# Altium PCB Control_Supply_PCB.PcbDoc (part 2 of 3)
Units mm, origin at the board's own origin, x right, y up, seen from the top; angles counter-clockwise.
Board outline 82 x 102 mm, 2 copper layers (Top Layer, Bottom Layer); 204 components, 0 nets, 808 pads, 240 vias.
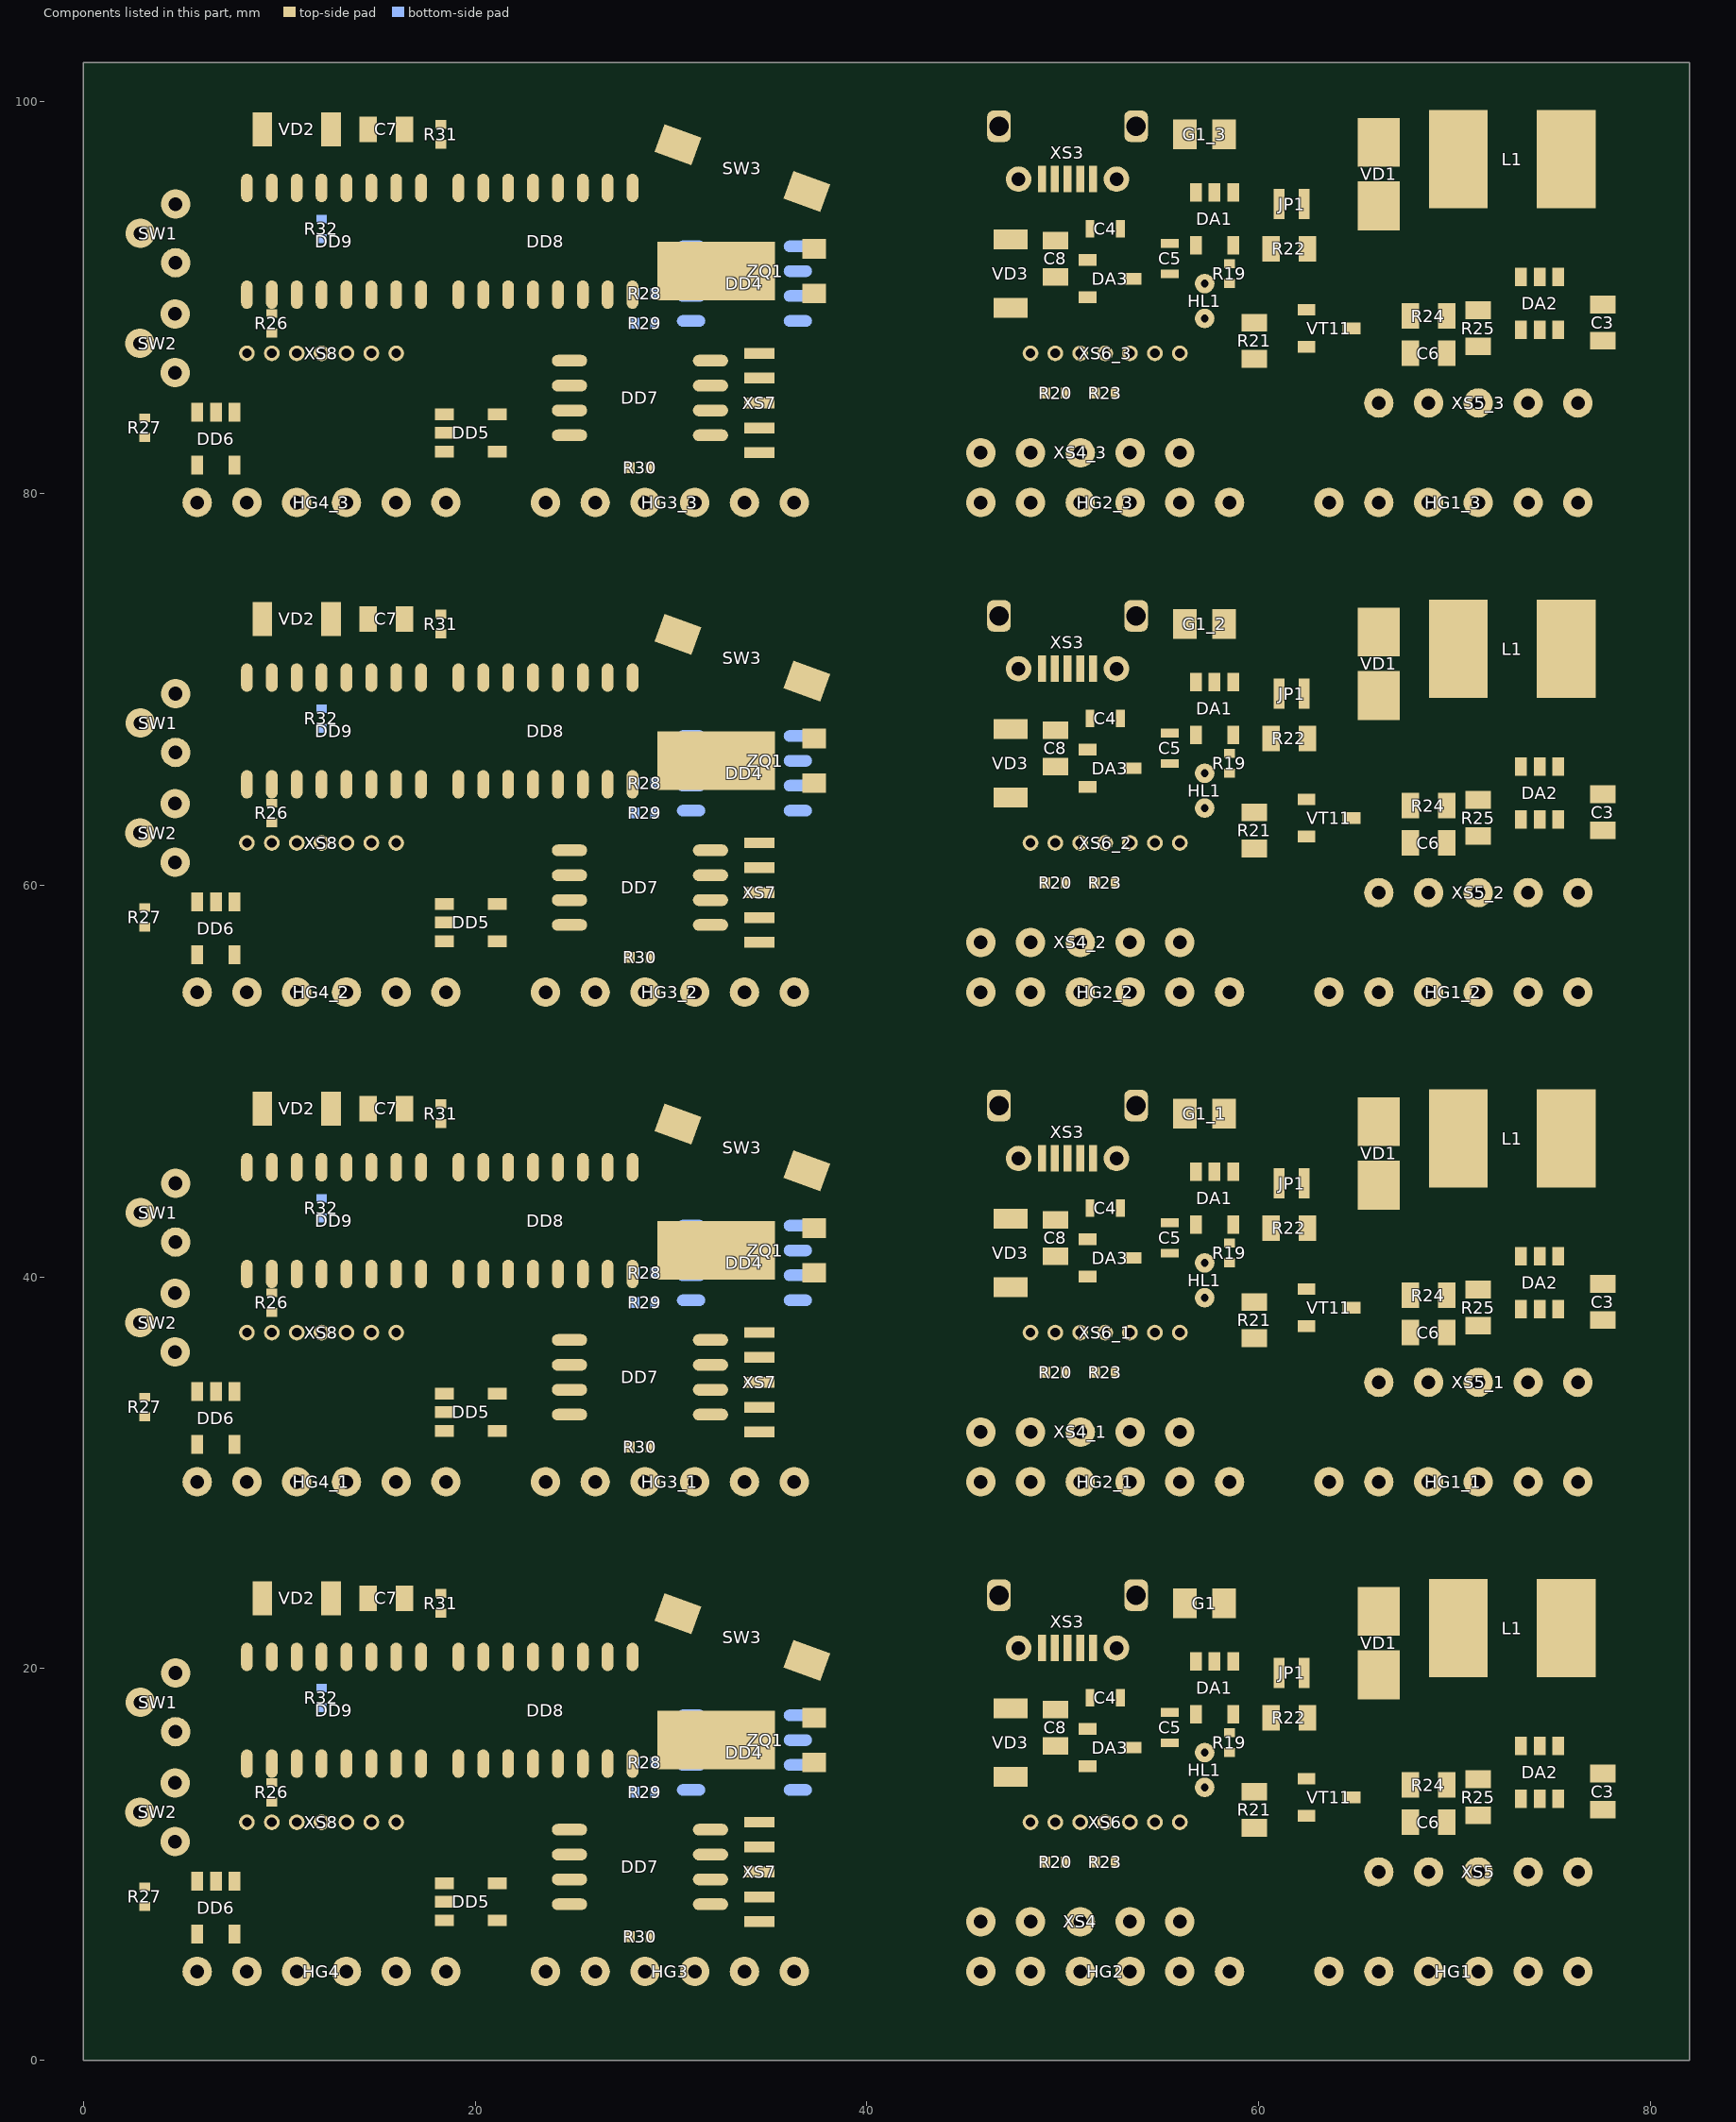
[diagram p2: the components of this part, seen from the top]

## Via types
v1: diameter 0.6, hole 0.3, Top Layer to Bottom Layer, 224 vias
v2: diameter 1.4, hole 1.3, Top Layer to Bottom Layer, 16 vias

## Nets (pads, with @x,y where several pads share a name; then routed paths per layer and width w, separated by ;. In a path a pad name is that pad's centre, name@x,y a point inside that pad or via, vN(x,y) a via of type N, cw(c..) or ccw(c..) an arc to the next point about the centre after c; other vN are vias at no path point) (continued)
copper on no net: | length 5010
  Top Layer w0.4: 3.068,7.833 3.093,7.858 3.143,7.858 3.193,7.858 3.905,7.146 3.905,7.06 ; 3.068,32.833 3.093,32.858 3.143,32.858 3.193,32.858 3.905,32.146 3.905,32.06 ; 3.068,57.833 3.093,57.858 3.143,57.858 3.193,57.858 3.905,57.146 3.905,57.06 ; 3.068,82.833 3.093,82.858 3.143,82.858 3.193,82.858 3.905,82.146 3.905,82.06 ; 3.215,8.883 3.19,8.858 3.143,8.858 3.143,9.747 4.564,11.168 4.685,11.168 ; 3.215,33.883 3.19,33.858 3.143,33.858 3.143,34.747 4.564,36.168 4.685,36.168 ; 3.215,58.883 3.19,58.858 3.143,58.858 3.143,59.747 4.564,61.168 4.685,61.168 ; 3.215,83.883 3.19,83.858 3.143,83.858 3.143,84.747 4.564,86.168 4.685,86.168 ; 4.685,14.168 4.794,14.277 4.794,16.693 4.707,16.78 5.675,17.748 8.604,17.748 9.62,16.732 9.62,15.15 9.62,14.184 ; 4.685,39.168 4.794,39.277 4.794,41.693 4.707,41.78 5.675,42.748 8.604,42.748 9.62,41.732 9.62,40.15 9.62,39.184 ; 4.685,64.168 4.794,64.277 4.794,66.693 4.707,66.78 5.675,67.748 8.604,67.748 9.62,66.732 9.62,65.15 9.62,64.184 ; 4.685,89.168 4.794,89.277 4.794,91.693 4.707,91.78 5.675,92.748 8.604,92.748 9.62,91.732 9.62,90.15 9.62,89.184 ; 4.707,19.78 6.993,22.066 11.711,22.066 12.092,21.685 v1(12.16,21.685) 12.16,20.6 ; 4.707,44.78 6.993,47.066 11.711,47.066 12.092,46.685 v1(12.16,46.685) 12.16,45.6 ; 4.707,69.78 6.993,72.066 11.711,72.066 12.092,71.685 v1(12.16,71.685) 12.16,70.6 ; 4.707,94.78 6.993,97.066 11.711,97.066 12.092,96.685 v1(12.16,96.685) 12.16,95.6 ; 5.81,4.54 5.813,4.543 5.813,6.443 5.815,6.445 ; 5.81,29.54 5.813,29.543 5.813,31.443 5.815,31.445 ; 5.81,54.54 5.813,54.543 5.813,56.443 5.815,56.445 ; 5.81,79.54 5.813,79.543 5.813,81.443 5.815,81.445 ; 5.915,9.245 5.815,9.145 5.815,8.97 3.905,7.06 ; 5.915,34.245 5.815,34.145 5.815,33.97 3.905,32.06 ; 5.915,59.245 5.815,59.145 5.815,58.97 3.905,57.06 ; 5.915,84.245 5.815,84.145 5.815,83.97 3.905,82.06 ; 6.765,9.145 6.826,9.206 v1(6.826,10.382) ; 6.765,34.145 6.826,34.206 v1(6.826,35.382) ; 6.765,59.145 6.826,59.206 v1(6.826,60.382) ; 6.765,84.145 6.826,84.206 v1(6.826,85.382) ; v1(7.588,23.59) 9.14,23.59 ; v1(7.588,48.59) 9.14,48.59 ; v1(7.588,73.59) 9.14,73.59 ; v1(7.588,98.59) 9.14,98.59 ; 7.715,6.445 7.715,6.62 8.985,7.89 ; 7.715,31.445 7.715,31.62 8.985,32.89 ; 7.715,56.445 7.715,56.62 8.985,57.89 ; 7.715,81.445 7.715,81.62 8.985,82.89 ; 8.35,4.54 6.445,2.635 5.175,2.635 3.905,3.905 3.905,7.06 ; 8.35,12.16 8.35,10.382 8.985,9.747 8.985,7.89 ; 8.35,15.15 v1(8.35,16.732) ; 8.35,20.6 8.35,19.34 9.561,18.129 13.049,18.129 v1(13.43,18.51) ; 8.35,29.54 6.445,27.635 5.175,27.635 3.905,28.905 3.905,32.06 ; 8.35,37.16 8.35,35.382 8.985,34.747 8.985,32.89 ; 8.35,40.15 v1(8.35,41.732) ; 8.35,45.6 8.35,44.34 9.561,43.129 13.049,43.129 v1(13.43,43.51) ; 8.35,54.54 6.445,52.635 5.175,52.635 3.905,53.905 3.905,57.06 ; 8.35,62.16 8.35,60.382 8.985,59.747 8.985,57.89 ; 8.35,65.15 v1(8.35,66.732) ; 8.35,70.6 8.35,69.34 9.561,68.129 13.049,68.129 v1(13.43,68.51) ; 8.35,79.54 6.445,77.635 5.175,77.635 3.905,78.905 3.905,82.06 ; 8.35,87.16 8.35,85.382 8.985,84.747 8.985,82.89 ; 8.35,90.15 v1(8.35,91.732) ; 8.35,95.6 8.35,94.34 9.561,93.129 13.049,93.129 v1(13.43,93.51) ; 9.62,12.16 9.62,13.184 ; 9.62,20.6 9.62,19.526 v1(10.255,18.891) ; 9.62,37.16 9.62,38.184 ; 9.62,45.6 9.62,44.526 v1(10.255,43.891) ; 9.62,62.16 9.62,63.184 ; 9.62,70.6 9.62,69.526 v1(10.255,68.891) ; 9.62,87.16 9.62,88.184 ; 9.62,95.6 9.62,94.526 v1(10.255,93.891) ; 10.89,15.15 10.89,13.684 11.398,13.176 14.319,13.176 14.7,12.795 14.7,12.16 14.7,10.255 16.859,8.096 18.43,8.096 ; 10.89,20.6 10.89,20.229 11.72,19.399 17.367,19.399 18.138,18.628 18.138,13.82 16.518,12.2 16.01,12.2 15.97,12.16 ; 10.89,40.15 10.89,38.684 11.398,38.176 14.319,38.176 14.7,37.795 14.7,37.16 14.7,35.255 16.859,33.096 18.43,33.096 ; 10.89,45.6 10.89,45.229 11.72,44.399 17.367,44.399 18.138,43.628 18.138,38.82 16.518,37.2 16.01,37.2 15.97,37.16 ; 10.89,65.15 10.89,63.684 11.398,63.176 14.319,63.176 14.7,62.795 14.7,62.16 14.7,60.255 16.859,58.096 18.43,58.096 ; 10.89,70.6 10.89,70.229 11.72,69.399 17.367,69.399 18.138,68.628 18.138,63.82 16.518,62.2 16.01,62.2 15.97,62.16 ; 10.89,90.15 10.89,88.684 11.398,88.176 14.319,88.176 14.7,87.795 14.7,87.16 14.7,85.255 16.859,83.096 18.43,83.096 ; 10.89,95.6 10.89,95.229 11.72,94.399 17.367,94.399 18.138,93.628 18.138,88.82 16.518,87.2 16.01,87.2 15.97,87.16 ; 12.16,12.16 12.16,9.62 15.97,5.81 15.97,4.54 17.24,3.27 32.48,3.27 33.75,4.54 ; 12.16,15.15 v1(12.16,16.732) ; 12.16,37.16 12.16,34.62 15.97,30.81 15.97,29.54 17.24,28.27 32.48,28.27 33.75,29.54 ; 12.16,40.15 v1(12.16,41.732) ; 12.16,62.16 12.16,59.62 15.97,55.81 15.97,54.54 17.24,53.27 32.48,53.27 33.75,54.54 ; 12.16,65.15 v1(12.16,66.732) ; 12.16,87.16 12.16,84.62 15.97,80.81 15.97,79.54 17.24,78.27 32.48,78.27 33.75,79.54 ; 12.16,90.15 v1(12.16,91.732) ; 12.64,23.59 14.537,23.59 14.7,23.427 v1(14.7,21.812) 14.662,21.774 14.662,21.117 14.7,21.079 ; 12.64,48.59 14.537,48.59 14.7,48.427 v1(14.7,46.812) 14.662,46.774 14.662,46.117 14.7,46.079 ; 12.64,73.59 14.537,73.59 14.7,73.427 v1(14.7,71.812) 14.662,71.774 14.662,71.117 14.7,71.079 ; 12.64,98.59 14.537,98.59 14.7,98.427 v1(14.7,96.812) 14.662,96.774 14.662,96.117 14.7,96.079 ; 13.43,4.54 13.43,6.445 11.985,7.89 8.985,7.89 ; 13.43,12.16 13.43,9.62 15.97,7.08 v1(17.24,7.08) 17.273,7.113 18.397,7.113 18.43,7.146 19.46,7.146 20.813,5.793 24.877,5.793 26.13,4.54 ; 13.43,15.15 13.43,15.629 13.53,15.729 13.53,15.816 16.224,18.51 16.969,18.51 v1(16.986,18.527) ; 13.43,20.6 v1(13.43,21.812) ; 13.43,29.54 13.43,31.445 11.985,32.89 8.985,32.89 ; 13.43,37.16 13.43,34.62 15.97,32.08 v1(17.24,32.08) 17.273,32.113 18.397,32.113 18.43,32.146 19.46,32.146 20.813,30.793 24.877,30.793 26.13,29.54 ; 13.43,40.15 13.43,40.629 13.53,40.729 13.53,40.816 16.224,43.51 16.969,43.51 v1(16.986,43.527) ; 13.43,45.6 v1(13.43,46.812) ; 13.43,54.54 13.43,56.445 11.985,57.89 8.985,57.89 ; 13.43,62.16 13.43,59.62 15.97,57.08 v1(17.24,57.08) 17.273,57.113 18.397,57.113 18.43,57.146 19.46,57.146 20.813,55.793 24.877,55.793 26.13,54.54 ; 13.43,65.15 13.43,65.629 13.53,65.729 13.53,65.816 16.224,68.51 16.969,68.51 v1(16.986,68.527) ; 13.43,70.6 v1(13.43,71.812) ; 13.43,79.54 13.43,81.445 11.985,82.89 8.985,82.89 ; 13.43,87.16 13.43,84.62 15.97,82.08 v1(17.24,82.08) 17.273,82.113 18.397,82.113 18.43,82.146 19.46,82.146 20.813,80.793 24.877,80.793 26.13,79.54 ; 13.43,90.15 13.43,90.629 13.53,90.729 13.53,90.816 16.224,93.51 16.969,93.51 v1(16.986,93.527) ; 13.43,95.6 v1(13.43,96.812) ; v1(15.97,14.065) 15.97,15.15 ; v1(15.97,39.065) 15.97,40.15 ; v1(15.97,64.065) 15.97,65.15 ; v1(15.97,89.065) 15.97,90.15 ; 16.387,23.59 16.633,23.836 18.256,23.836 ; 16.387,48.59 16.633,48.836 18.256,48.836 ; 16.387,73.59 16.633,73.836 18.256,73.836 ; 16.387,98.59 16.633,98.836 18.256,98.836 ; v1(16.986,9.112) 16.986,11.652 18.002,12.668 19.399,12.668 20.377,13.646 20.377,15.112 20.415,15.15 ; v1(16.986,34.112) 16.986,36.652 18.002,37.668 19.399,37.668 20.377,38.646 20.377,40.112 20.415,40.15 ; v1(16.986,59.112) 16.986,61.652 18.002,62.668 19.399,62.668 20.377,63.646 20.377,65.112 20.415,65.15 ; v1(16.986,84.112) 16.986,86.652 18.002,87.668 19.399,87.668 20.377,88.646 20.377,90.112 20.415,90.15 ; 17.24,20.6 v1(17.24,21.812) ; 17.24,45.6 v1(17.24,46.812) ; 17.24,70.6 v1(17.24,71.812) ; 17.24,95.6 v1(17.24,96.812) ; 18.256,22.836 18.256,19.73 20.255,17.731 25.605,17.731 26.765,18.891 ; 18.256,47.836 18.256,44.73 20.255,42.731 25.605,42.731 26.765,43.891 ; 18.256,72.836 18.256,69.73 20.255,67.731 25.605,67.731 26.765,68.891 ; 18.256,97.836 18.256,94.73 20.255,92.731 25.605,92.731 26.765,93.891 ; 18.51,4.54 23.59,4.54 ; 18.51,29.54 23.59,29.54 ; 18.51,54.54 23.59,54.54 ; 18.51,79.54 23.59,79.54 ; v1(18.764,10.636) 20.288,10.636 22.955,13.303 27.781,13.303 30.575,10.509 32.016,10.509 ; v1(18.764,35.636) 20.288,35.636 22.955,38.303 27.781,38.303 30.575,35.509 32.016,35.509 ; v1(18.764,60.636) 20.288,60.636 22.955,63.303 27.781,63.303 30.575,60.509 32.016,60.509 ; v1(18.764,85.636) 20.288,85.636 22.955,88.303 27.781,88.303 30.575,85.509 32.016,85.509 ; 19.145,15.15 19.145,14.671 19.478,14.338 19.478,14.271 v1(19.399,14.192) ; 19.145,20.6 v1(19.145,21.832) 19.193,21.88 19.193,22.225 20.304,23.336 29.274,23.336 30.315,22.295 ; 19.145,40.15 19.145,39.671 19.478,39.338 19.478,39.271 v1(19.399,39.192) ; 19.145,45.6 v1(19.145,46.832) 19.193,46.88 19.193,47.225 20.304,48.336 29.274,48.336 30.315,47.295 ; 19.145,65.15 19.145,64.671 19.478,64.338 19.478,64.271 v1(19.399,64.192) ; 19.145,70.6 v1(19.145,71.832) 19.193,71.88 19.193,72.225 20.304,73.336 29.274,73.336 30.315,72.295 ; 19.145,90.15 19.145,89.671 19.478,89.338 19.478,89.271 v1(19.399,89.192) ; 19.145,95.6 v1(19.145,96.832) 19.193,96.88 19.193,97.225 20.304,98.336 29.274,98.336 30.315,97.295 ; v1(20.034,19.018) 20.415,19.399 20.415,20.6 ; v1(20.034,44.018) 20.415,44.399 20.415,45.6 ; v1(20.034,69.018) 20.415,69.399 20.415,70.6 ; v1(20.034,94.018) 20.415,94.399 20.415,95.6 ; 21.13,7.146 21.163,7.113 21.977,7.113 22.066,7.024 v1(22.066,7.08) ; 21.13,9.046 21.196,9.112 21.958,8.35 v1(22.066,8.35) ; 21.13,32.146 21.163,32.113 21.977,32.113 22.066,32.024 v1(22.066,32.08) ; 21.13,34.046 21.196,34.112 21.958,33.35 v1(22.066,33.35) ; 21.13,57.146 21.163,57.113 21.977,57.113 22.066,57.024 v1(22.066,57.08) ; 21.13,59.046 21.196,59.112 21.958,58.35 v1(22.066,58.35) ; 21.13,82.146 21.163,82.113 21.977,82.113 22.066,82.024 v1(22.066,82.08) ; 21.13,84.046 21.196,84.112 21.958,83.35 v1(22.066,83.35) ; v1(21.661,14.175) 21.673,14.187 21.673,15.138 21.685,15.15 ; v1(21.661,39.175) 21.673,39.187 21.673,40.138 21.685,40.15 ; v1(21.661,64.175) 21.673,64.187 21.673,65.138 21.685,65.15 ; v1(21.661,89.175) 21.673,89.187 21.673,90.138 21.685,90.15 ; 21.685,20.6 21.685,21.079 21.891,21.285 21.891,21.51 v1(21.939,21.558) ; 21.685,45.6 21.685,46.079 21.891,46.285 21.891,46.51 v1(21.939,46.558) ; 21.685,70.6 21.685,71.079 21.891,71.285 21.891,71.51 v1(21.939,71.558) ; 21.685,95.6 21.685,96.079 21.891,96.285 21.891,96.51 v1(21.939,96.558) ; v1(21.812,10.636) 21.812,10.799 23.662,12.649 27.419,12.649 30.829,9.239 32.016,9.239 ; v1(21.812,35.636) 21.812,35.799 23.662,37.649 27.419,37.649 30.829,34.239 32.016,34.239 ; v1(21.812,60.636) 21.812,60.799 23.662,62.649 27.419,62.649 30.829,59.239 32.016,59.239 ; v1(21.812,85.636) 21.812,85.799 23.662,87.649 27.419,87.649 30.829,84.239 32.016,84.239 ; v1(22.447,18.51) 23.267,18.51 24.225,19.468 24.225,20.6 ; v1(22.447,43.51) 23.267,43.51 24.225,44.468 24.225,45.6 ; v1(22.447,68.51) 23.267,68.51 24.225,69.468 24.225,70.6 ; v1(22.447,93.51) 23.267,93.51 24.225,94.468 24.225,95.6 ; 22.955,15.15 22.917,15.112 22.917,14.281 21.812,13.176 21.506,13.176 19.855,11.525 17.982,11.525 17.748,11.291 17.748,10.091 17.982,9.857 22.135,9.857 23.082,10.804 24.018,11.741 24.778,11.741 24.816,11.779 ; v1(22.955,16.859) 24.157,16.859 25.341,15.675 25.495,15.521 25.495,15.15 ; 22.955,20.6 22.955,21.079 23.415,21.539 23.415,21.747 v1(23.463,21.795) ; 22.955,40.15 22.917,40.112 22.917,39.281 21.812,38.176 21.506,38.176 19.855,36.525 17.982,36.525 17.748,36.291 17.748,35.091 17.982,34.857 22.135,34.857 23.082,35.804 24.018,36.741 24.778,36.741 24.816,36.779 ; v1(22.955,41.859) 24.157,41.859 25.341,40.675 25.495,40.521 25.495,40.15 ; 22.955,45.6 22.955,46.079 23.415,46.539 23.415,46.747 v1(23.463,46.795) ; 22.955,65.15 22.917,65.112 22.917,64.281 21.812,63.176 21.506,63.176 19.855,61.525 17.982,61.525 17.748,61.291 17.748,60.091 17.982,59.857 22.135,59.857 23.082,60.804 24.018,61.741 24.778,61.741 24.816,61.779 ; v1(22.955,66.859) 24.157,66.859 25.341,65.675 25.495,65.521 25.495,65.15 ; 22.955,70.6 22.955,71.079 23.415,71.539 23.415,71.747 v1(23.463,71.795) ; 22.955,90.15 22.917,90.112 22.917,89.281 21.812,88.176 21.506,88.176 19.855,86.525 17.982,86.525 17.748,86.291 17.748,85.091 17.982,84.857 22.135,84.857 23.082,85.804 24.018,86.741 24.778,86.741 24.816,86.779 ; v1(22.955,91.859) 24.157,91.859 25.341,90.675 25.495,90.521 25.495,90.15 ; 22.955,95.6 22.955,96.079 23.415,96.539 23.415,96.747 v1(23.463,96.795) ; v1(23.082,9.366) 23.082,9.375 24.151,10.444 24.751,10.444 24.816,10.509 ; v1(23.082,34.366) 23.082,34.375 24.151,35.444 24.751,35.444 24.816,35.509 ; v1(23.082,59.366) 23.082,59.375 24.151,60.444 24.751,60.444 24.816,60.509 ; v1(23.082,84.366) 23.082,84.375 24.151,85.444 24.751,85.444 24.816,85.509 ; 24.225,15.15 24.225,14.172 24.44,13.957 29.159,13.957 v1(29.94,13.176) ; 24.225,40.15 24.225,39.172 24.44,38.957 29.159,38.957 v1(29.94,38.176) ; 24.225,65.15 24.225,64.172 24.44,63.957 29.159,63.957 v1(29.94,63.176) ; 24.225,90.15 24.225,89.172 24.44,88.957 29.159,88.957 v1(29.94,88.176) ; 24.816,7.969 25.416,7.969 26.242,7.144 ; 24.816,9.239 24.854,9.277 26.041,9.277 26.638,9.874 v1(26.638,11.652) ; 24.816,32.969 25.416,32.969 26.242,32.144 ; 24.816,34.239 24.854,34.277 26.041,34.277 26.638,34.874 v1(26.638,36.652) ; 24.816,57.969 25.416,57.969 26.242,57.144 ; 24.816,59.239 24.854,59.277 26.041,59.277 26.638,59.874 v1(26.638,61.652) ; 24.816,82.969 25.416,82.969 26.242,82.144 ; 24.816,84.239 24.854,84.277 26.041,84.277 26.638,84.874 v1(26.638,86.652) ; 26.765,20.6 26.765,18.891 ; 26.765,45.6 26.765,43.891 ; 26.765,70.6 26.765,68.891 ; 26.765,95.6 26.765,93.891 ; v1(27.4,10.89) 27.4,8.302 26.242,7.144 ; v1(27.4,35.89) 27.4,33.302 26.242,32.144 ; v1(27.4,60.89) 27.4,58.302 26.242,57.144 ; v1(27.4,85.89) 27.4,83.302 26.242,82.144 ; 27.916,6.318 27.067,6.318 26.242,7.144 ; 27.916,31.318 27.067,31.318 26.242,32.144 ; 27.916,56.318 27.067,56.318 26.242,57.144 ; 27.916,81.318 27.067,81.318 26.242,82.144 ; 28.67,4.54 28.71,4.58 ; 28.67,29.54 28.71,29.58 ; 28.67,54.54 28.71,54.58 ; 28.67,79.54 28.71,79.58 ; 28.916,6.318 32.388,6.318 33.15,7.08 ; 28.916,31.318 32.388,31.318 33.15,32.08 ; 28.916,56.318 32.388,56.318 33.15,57.08 ; 28.916,81.318 32.388,81.318 33.15,82.08 ; 32.016,7.969 32.562,7.969 32.654,7.877 32.654,7.576 33.15,7.08 ; 32.016,11.779 32.134,11.779 ; 32.016,32.969 32.562,32.969 32.654,32.877 32.654,32.576 33.15,32.08 ; 32.016,36.779 32.134,36.779 ; 32.016,57.969 32.562,57.969 32.654,57.877 32.654,57.576 33.15,57.08 ; 32.016,61.779 32.134,61.779 ; 32.016,82.969 32.562,82.969 32.654,82.877 32.654,82.576 33.15,82.08 ; 32.016,86.779 32.134,86.779 ; 32.226,11.871 32.134,11.779 ; 32.226,16.224 32.226,16.478 ; 32.226,36.871 32.134,36.779 ; 32.226,41.224 32.226,41.478 ; 32.226,61.871 32.134,61.779 ; 32.226,66.224 32.226,66.478 ; 32.226,86.871 32.134,86.779 ; 32.226,91.224 32.226,91.478 ; v1(34.004,12.16) 33.051,12.16 32.67,11.779 32.134,11.779 ; v1(34.004,37.16) 33.051,37.16 32.67,36.779 32.134,36.779 ; v1(34.004,62.16) 33.051,62.16 32.67,61.779 32.134,61.779 ; v1(34.004,87.16) 33.051,87.16 32.67,86.779 32.134,86.779 ; 34.512,7.08 33.15,7.08 ; 34.512,32.08 33.15,32.08 ; 34.512,57.08 33.15,57.08 ; 34.512,82.08 33.15,82.08 ; 36.925,20.415 36.671,20.161 32.226,20.161 30.956,18.891 26.765,18.891 ; 36.925,45.415 36.671,45.161 32.226,45.161 30.956,43.891 26.765,43.891 ; 36.925,70.415 36.671,70.161 32.226,70.161 30.956,68.891 26.765,68.891 ; 36.925,95.415 36.671,95.161 32.226,95.161 30.956,93.891 26.765,93.891 ; 37.306,15.208 v1(38.576,15.208) ; 37.306,17.494 v1(38.576,17.494) ; 37.306,40.208 v1(38.576,40.208) ; 37.306,42.494 v1(38.576,42.494) ; 37.306,65.208 v1(38.576,65.208) ; 37.306,67.494 v1(38.576,67.494) ; 37.306,90.208 v1(38.576,90.208) ; 37.306,92.494 v1(38.576,92.494) ; 45.81,7.08 45.81,4.54 47.842,2.508 61.558,2.508 63.59,4.54 ; 45.81,32.08 45.81,29.54 47.842,27.508 61.558,27.508 63.59,29.54 ; 45.81,57.08 45.81,54.54 47.842,52.508 61.558,52.508 63.59,54.54 ; 45.81,82.08 45.81,79.54 47.842,77.508 61.558,77.508 63.59,79.54 ; v1(46.318,11.398) 46.318,13.666 47.126,14.474 47.334,14.474 ; v1(46.318,36.398) 46.318,38.666 47.126,39.474 47.334,39.474 ; v1(46.318,61.398) 46.318,63.666 47.126,64.474 47.334,64.474 ; v1(46.318,86.398) 46.318,88.666 47.126,89.474 47.334,89.474 ; 47.334,17.974 47.362,18.002 v1(48.604,18.002) ; 47.334,42.974 47.362,43.002 v1(48.604,43.002) ; 47.334,67.974 47.362,68.002 v1(48.604,68.002) ; 47.334,92.974 47.362,93.002 v1(48.604,93.002) ; 48.35,7.08 48.35,4.54 49.62,3.27 59.78,3.27 62.32,5.81 64.86,5.81 66.13,4.54 ; v1(48.35,10.128) 49.128,10.128 ; v1@48.35,17.988 49.352,17.988 49.366,18.002 ; 48.35,32.08 48.35,29.54 49.62,28.27 59.78,28.27 62.32,30.81 64.86,30.81 66.13,29.54 ; v1(48.35,35.128) 49.128,35.128 ; v1@48.35,42.988 49.352,42.988 49.366,43.002 ; 48.35,57.08 48.35,54.54 49.62,53.27 59.78,53.27 62.32,55.81 64.86,55.81 66.13,54.54 ; v1(48.35,60.128) 49.128,60.128 ; v1@48.35,67.988 49.352,67.988 49.366,68.002 ; 48.35,82.08 48.35,79.54 49.62,78.27 59.78,78.27 62.32,80.81 64.86,80.81 66.13,79.54 ; v1(48.35,85.128) 49.128,85.128 ; v1@48.35,92.988 49.352,92.988 49.366,93.002 ; 48.94,21.05 48.94,19.76 49.174,19.526 50.594,19.526 51.385,18.735 51.385,18.51 51.385,18.285 51.264,18.164 51.264,16.92 52.18,16.92 52.414,16.686 52.414,14.954 52.922,14.446 v1(54.192,14.446) ; 48.94,46.05 48.94,44.76 49.174,44.526 50.594,44.526 51.385,43.735 51.385,43.51 51.385,43.285 51.264,43.164 51.264,41.92 52.18,41.92 52.414,41.686 52.414,39.954 52.922,39.446 v1(54.192,39.446) ; 48.94,71.05 48.94,69.76 49.174,69.526 50.594,69.526 51.385,68.735 51.385,68.51 51.385,68.285 51.264,68.164 51.264,66.92 52.18,66.92 52.414,66.686 52.414,64.954 52.922,64.446 v1(54.192,64.446) ; 48.94,96.05 48.94,94.76 49.174,94.526 50.594,94.526 51.385,93.735 51.385,93.51 51.385,93.285 51.264,93.164 51.264,91.92 52.18,91.92 52.414,91.686 52.414,89.954 52.922,89.446 v1(54.192,89.446) ; 49.62,12.16 49.62,13.43 ; v1(49.62,14.609) 49.62,15.833 ; 49.62,37.16 49.62,38.43 ; v1(49.62,39.609) 49.62,40.833 ; 49.62,62.16 49.62,63.43 ; v1(49.62,64.609) 49.62,65.833 ; 49.62,87.16 49.62,88.43 ; v1(49.62,89.609) 49.62,90.833 ; 50.128,10.141 50.89,10.141 ; 50.128,35.141 50.89,35.141 ; 50.128,60.141 50.89,60.141 ; 50.128,85.141 50.89,85.141 ; 50.89,4.54 50.89,7.08 ; 50.89,12.16 50.89,10.141 ; 50.89,29.54 50.89,32.08 ; 50.89,37.16 50.89,35.141 ; 50.89,54.54 50.89,57.08 ; 50.89,62.16 50.89,60.141 ; 50.89,79.54 50.89,82.08 ; 50.89,87.16 50.89,85.141 ; 51.264,15.02 51.324,14.96 51.324,13.43 ; 51.264,40.02 51.324,39.96 51.324,38.43 ; 51.264,65.02 51.324,64.96 51.324,63.43 ; 51.264,90.02 51.324,89.96 51.324,88.43 ; 51.54,21.05 51.54,19.892 51.889,19.543 55.699,19.543 56.732,18.51 56.732,17.48 ; 51.54,46.05 51.54,44.892 51.889,44.543 55.699,44.543 56.732,43.51 56.732,42.48 ; 51.54,71.05 51.54,69.892 51.889,69.543 55.699,69.543 56.732,68.51 56.732,67.48 ; 51.54,96.05 51.54,94.892 51.889,94.543 55.699,94.543 56.732,93.51 56.732,92.48 ; 51.635,10.128 51.635,10.141 50.89,10.141 ; 51.635,35.128 51.635,35.141 50.89,35.141 ; 51.635,60.128 51.635,60.141 50.89,60.141 ; 51.635,85.128 51.635,85.141 50.89,85.141 ; 52.881,10.141 53.196,10.141 53.43,10.375 53.43,12.16 53.499,12.229 ; 52.881,35.141 53.196,35.141 53.43,35.375 53.43,37.16 53.499,37.229 ; 52.881,60.141 53.196,60.141 53.43,60.375 53.43,62.16 53.499,62.229 ; 52.881,85.141 53.196,85.141 53.43,85.375 53.43,87.16 53.499,87.229 ; 52.935,18.51 53.436,18.51 ; 52.935,43.51 53.436,43.51 ; 52.935,68.51 53.436,68.51 ; 52.935,93.51 53.436,93.51 ; 53.43,4.54 53.43,7.08 ; 53.43,29.54 53.43,32.08 ; 53.43,54.54 53.43,57.08 ; 53.43,79.54 53.43,82.08 ; 53.564,15.97 53.536,15.97 53.436,16.07 53.436,18.51 ; 53.564,40.97 53.536,40.97 53.436,41.07 53.436,43.51 ; 53.564,65.97 53.536,65.97 53.436,66.07 53.436,68.51 ; 53.564,90.97 53.536,90.97 53.436,91.07 53.436,93.51 ; v1(53.938,18.51) 53.436,18.51 ; v1(53.938,43.51) 53.436,43.51 ; v1(53.938,68.51) 53.436,68.51 ; v1(53.938,93.51) 53.436,93.51 ; 54.7,12.16 54.7,11.144 56.224,9.62 63.844,9.62 65.114,8.35 72.48,8.35 73.75,9.62 ; 54.7,37.16 54.7,36.144 56.224,34.62 63.844,34.62 65.114,33.35 72.48,33.35 73.75,34.62 ; 54.7,62.16 54.7,61.144 56.224,59.62 63.844,59.62 65.114,58.35 72.48,58.35 73.75,59.62 ; 54.7,87.16 54.7,86.144 56.224,84.62 63.844,84.62 65.114,83.35 72.48,83.35 73.75,84.62 ; v1(55.208,18.51) 55.212,18.506 55.212,17.786 55.237,17.761 55.462,17.761 ; v1(55.208,43.51) 55.212,43.506 55.212,42.786 55.237,42.761 55.462,42.761 ; v1(55.208,68.51) 55.212,68.506 55.212,67.786 55.237,67.761 55.462,67.761 ; v1(55.208,93.51) 55.212,93.506 55.212,92.786 55.237,92.761 55.462,92.761 ; 55.462,16.211 55.462,14.192 54.7,13.43 51.324,13.43 ; v1(55.462,20.542) 55.479,20.525 56.562,20.525 56.798,20.289 56.798,20.114 ; 55.462,41.211 55.462,39.192 54.7,38.43 51.324,38.43 ; v1(55.462,45.542) 55.479,45.525 56.562,45.525 56.798,45.289 56.798,45.114 ; 55.462,66.211 55.462,64.192 54.7,63.43 51.324,63.43 ; v1(55.462,70.542) 55.479,70.525 56.562,70.525 56.798,70.289 56.798,70.114 ; 55.462,91.211 55.462,89.192 54.7,88.43 51.324,88.43 ; v1(55.462,95.542) 55.479,95.525 56.562,95.525 56.798,95.289 56.798,95.114 ; 55.97,4.54 55.97,7.08 56.131,6.919 56.531,6.919 56.624,6.826 71.464,6.826 73.75,4.54 ; 55.97,12.16 56.068,12.16 56.322,11.906 59.744,11.906 59.78,11.87 ; 55.97,29.54 55.97,32.08 56.131,31.919 56.531,31.919 56.624,31.826 71.464,31.826 73.75,29.54 ; 55.97,37.16 56.068,37.16 56.322,36.906 59.744,36.906 59.78,36.87 ; 55.97,54.54 55.97,57.08 56.131,56.919 56.531,56.919 56.624,56.826 71.464,56.826 73.75,54.54 ; 55.97,62.16 56.068,62.16 56.322,61.906 59.744,61.906 59.78,61.87 ; 55.97,79.54 55.97,82.08 56.131,81.919 56.531,81.919 56.624,81.826 71.464,81.826 73.75,79.54 ; 55.97,87.16 56.068,87.16 56.322,86.906 59.744,86.906 59.78,86.87 ; 56.224,23.336 56.224,21.812 56.478,21.558 v1(57.748,21.558) 57.748,20.368 57.748,20.114 ; 56.224,48.336 56.224,46.812 56.478,46.558 v1(57.748,46.558) 57.748,45.368 57.748,45.114 ; 56.224,73.336 56.224,71.812 56.478,71.558 v1(57.748,71.558) 57.748,70.368 57.748,70.114 ; 56.224,98.336 56.224,96.812 56.478,96.558 v1(57.748,96.558) 57.748,95.368 57.748,95.114 ; 56.798,17.668 56.798,17.414 56.798,16.32 57.24,15.878 57.24,15.716 57.244,15.72 58.506,15.72 58.51,15.724 ; 56.798,42.668 56.798,42.414 56.798,41.32 57.24,40.878 57.24,40.716 57.244,40.72 58.506,40.72 58.51,40.724 ; 56.798,67.668 56.798,67.414 56.798,66.32 57.24,65.878 57.24,65.716 57.244,65.72 58.506,65.72 58.51,65.724 ; 56.798,92.668 56.798,92.414 56.798,91.32 57.24,90.878 57.24,90.716 57.244,90.72 58.506,90.72 58.51,90.724 ; 58.224,23.336 61.812,23.336 62.32,22.828 62.32,20.288 ; 58.224,48.336 61.812,48.336 62.32,47.828 62.32,45.288 ; 58.224,73.336 61.812,73.336 62.32,72.828 62.32,70.288 ; 58.224,98.336 61.812,98.336 62.32,97.828 62.32,95.288 ; 58.46,16.724 58.51,16.724 58.56,16.724 58.585,16.749 58.585,16.799 58.598,16.812 58.598,17.568 58.698,17.668 ; 58.46,41.724 58.51,41.724 58.56,41.724 58.585,41.749 58.585,41.799 58.598,41.812 58.598,42.568 58.698,42.668 ; 58.46,66.724 58.51,66.724 58.56,66.724 58.585,66.749 58.585,66.799 58.598,66.812 58.598,67.568 58.698,67.668 ; 58.46,91.724 58.51,91.724 58.56,91.724 58.585,91.749 58.585,91.799 58.598,91.812 58.598,92.568 58.698,92.668 ; 58.686,17.402 58.698,17.414 ; 58.686,42.402 58.698,42.414 ; 58.686,67.402 58.698,67.414 ; 58.686,92.402 58.698,92.414 ; 58.698,20.368 59.546,20.368 59.78,20.134 59.78,18.002 60.034,17.748 60.633,17.748 ; 58.698,45.368 59.546,45.368 59.78,45.134 59.78,43.002 60.034,42.748 60.633,42.748 ; 58.698,70.368 59.546,70.368 59.78,70.134 59.78,68.002 60.034,67.748 60.633,67.748 ; 58.698,95.368 59.546,95.368 59.78,95.134 59.78,93.002 60.034,92.748 60.633,92.748 ; 59.78,13.72 59.87,13.81 59.87,14.536 v1(61.304,15.97) ; 59.78,38.72 59.87,38.81 59.87,39.536 v1(61.304,40.97) ; 59.78,63.72 59.87,63.81 59.87,64.536 v1(61.304,65.97) ; 59.78,88.72 59.87,88.81 59.87,89.536 v1(61.304,90.97) ; 60.975,20.213 61.05,20.288 v1(61.05,21.812) ; 60.975,45.213 61.05,45.288 v1(61.05,46.812) ; 60.975,70.213 61.05,70.288 v1(61.05,71.812) ; 60.975,95.213 61.05,95.288 v1(61.05,96.812) ; v1@61.499,12.58 62.34,12.58 62.44,12.48 ; v1@61.499,37.58 62.34,37.58 62.44,37.48 ; v1@61.499,62.58 62.34,62.58 62.44,62.48 ; v1@61.499,87.58 62.34,87.58 62.44,87.48 ; 62.44,14.38 63.27,14.38 63.844,14.954 v1(63.844,15.97) ; 62.44,39.38 63.27,39.38 63.844,39.954 v1(63.844,40.97) ; 62.44,64.38 63.27,64.38 63.844,64.954 v1(63.844,65.97) ; 62.44,89.38 63.27,89.38 63.844,89.954 v1(63.844,90.97) ; 62.483,17.748 62.679,17.944 63.024,17.944 v1(63.59,18.51) ; 62.483,42.748 62.679,42.944 63.024,42.944 v1(63.59,43.51) ; 62.483,67.748 62.679,67.944 63.024,67.944 v1(63.59,68.51) ; 62.483,92.748 62.679,92.944 63.024,92.944 v1(63.59,93.51) ; 64.74,13.43 v1(66.13,13.43) ; 64.74,38.43 v1(66.13,38.43) ; 64.74,63.43 v1(66.13,63.43) ; 64.74,88.43 v1(66.13,88.43) ; 66.13,9.62 66.13,11.926 66.364,12.16 67.745,12.16 67.745,14.265 ; 66.13,34.62 66.13,36.926 66.364,37.16 67.745,37.16 67.745,39.265 ; 66.13,59.62 66.13,61.926 66.364,62.16 67.745,62.16 67.745,64.265 ; 66.13,84.62 66.13,86.926 66.364,87.16 67.745,87.16 67.745,89.265 ; 69.595,12.16 69.595,12.255 69.845,12.505 71.21,12.505 71.21,11.063 ; 69.595,14.065 70.982,14.065 ; 69.595,37.16 69.595,37.255 69.845,37.505 71.21,37.505 71.21,36.063 ; 69.595,39.065 70.982,39.065 ; 69.595,62.16 69.595,62.255 69.845,62.505 71.21,62.505 71.21,61.063 ; 69.595,64.065 70.982,64.065 ; 69.595,87.16 69.595,87.255 69.845,87.505 71.21,87.505 71.21,86.063 ; 69.595,89.065 70.982,89.065 ; 71.21,9.62 71.21,11.063 ; 71.21,14.355 71.46,14.605 71.799,14.605 71.894,14.7 75.02,14.7 75.29,14.43 75.29,13.35 ; 71.21,34.62 71.21,36.063 ; 71.21,39.355 71.46,39.605 71.799,39.605 71.894,39.7 75.02,39.7 75.29,39.43 75.29,38.35 ; 71.21,59.62 71.21,61.063 ; 71.21,64.355 71.46,64.605 71.799,64.605 71.894,64.7 75.02,64.7 75.29,64.43 75.29,63.35 ; 71.21,84.62 71.21,86.063 ; 71.21,89.355 71.46,89.605 71.799,89.605 71.894,89.7 75.02,89.7 75.29,89.43 75.29,88.35 ; v1(73.115,12.16) 73.115,12.228 73.29,12.403 73.29,13.25 73.39,13.35 ; v1(73.115,37.16) 73.115,37.228 73.29,37.403 73.29,38.25 73.39,38.35 ; v1(73.115,62.16) 73.115,62.228 73.29,62.403 73.29,63.25 73.39,63.35 ; v1(73.115,87.16) 73.115,87.228 73.29,87.403 73.29,88.25 73.39,88.35 ; 74.34,13.35 74.34,12.394 74.385,12.349 ; 74.34,16.05 75.29,16.05 77.326,16.05 v1(77.56,15.816) 77.56,14.645 ; 74.34,38.35 74.34,37.394 74.385,37.349 ; 74.34,41.05 75.29,41.05 77.326,41.05 v1(77.56,40.816) 77.56,39.645 ; 74.34,63.35 74.34,62.394 74.385,62.349 ; 74.34,66.05 75.29,66.05 77.326,66.05 v1(77.56,65.816) 77.56,64.645 ; 74.34,88.35 74.34,87.394 74.385,87.349 ; 74.34,91.05 75.29,91.05 77.326,91.05 v1(77.56,90.816) 77.56,89.645 ; 76.29,9.62 74.258,7.588 62.828,7.588 61.812,8.604 48.35,8.604 47.287,9.667 47.287,12.875 47.842,13.43 49.62,13.43 ; 76.29,34.62 74.258,32.588 62.828,32.588 61.812,33.604 48.35,33.604 47.287,34.667 47.287,37.875 47.842,38.43 49.62,38.43 ; 76.29,59.62 74.258,57.588 62.828,57.588 61.812,58.604 48.35,58.604 47.287,59.667 47.287,62.875 47.842,63.43 49.62,63.43 ; 76.29,84.62 74.258,82.588 62.828,82.588 61.812,83.604 48.35,83.604 47.287,84.667 47.287,87.875 47.842,88.43 49.62,88.43 ; 77.56,12.394 77.326,12.16 74.574,12.16 74.385,12.349 ; 77.56,37.394 77.326,37.16 74.574,37.16 74.385,37.349 ; 77.56,62.394 77.326,62.16 74.574,62.16 74.385,62.349 ; 77.56,87.394 77.326,87.16 74.574,87.16 74.385,87.349 ; 49.62,13.43 51.324,13.43 ; 49.62,38.43 51.324,38.43 ; 49.62,63.43 51.324,63.43 ; 49.62,88.43 51.324,88.43 ; 71.21,11.063 74.151,11.063 74.385,11.297 74.385,12.349 ; 71.21,36.063 74.151,36.063 74.385,36.297 74.385,37.349 ; 71.21,61.063 74.151,61.063 74.385,61.297 74.385,62.349 ; 71.21,86.063 74.151,86.063 74.385,86.297 74.385,87.349
  Top Layer w0.6: 66.13,19.679 66.13,15.528 67.243,14.415 67.595,14.415 67.745,14.265 67.745,14.065 ; 66.13,44.679 66.13,40.528 67.243,39.415 67.595,39.415 67.745,39.265 67.745,39.065 ; 66.13,69.679 66.13,65.528 67.243,64.415 67.595,64.415 67.745,64.265 67.745,64.065 ; 66.13,94.679 66.13,90.528 67.243,89.415 67.595,89.415 67.745,89.265 67.745,89.065 ; 66.892,22.929 71.108,22.929 ; 66.892,47.929 71.108,47.929 ; 66.892,72.929 71.108,72.929 ; 66.892,97.929 71.108,97.929 ; 70.194,22.32 70.194,22.066 70.194,17.494 v1(71.464,16.224) ; 70.194,47.32 70.194,47.066 70.194,42.494 v1(71.464,41.224) ; 70.194,72.32 70.194,72.066 70.194,67.494 v1(71.464,66.224) ; 70.194,97.32 70.194,97.066 70.194,92.494 v1(71.464,91.224) ; 75.29,16.05 75.29,21.662 75.694,22.066 ; 75.29,41.05 75.29,46.662 75.694,47.066 ; 75.29,66.05 75.29,71.662 75.694,72.066 ; 75.29,91.05 75.29,96.662 75.694,97.066
  Top Layer w0.8: 14.7,15.15 15.97,15.15 17.24,15.15 ; 14.7,40.15 15.97,40.15 17.24,40.15 ; 14.7,65.15 15.97,65.15 17.24,65.15 ; 14.7,90.15 15.97,90.15 17.24,90.15 ; 15.97,20.6 17.24,20.6 ; 15.97,45.6 17.24,45.6 ; 15.97,70.6 17.24,70.6 ; 15.97,95.6 17.24,95.6 ; 25.495,15.15 26.765,15.15 28.035,15.15 28.035,15.755 28.504,16.224 32.226,16.224 ; 25.495,20.6 26.765,20.6 28.035,20.6 ; 25.495,40.15 26.765,40.15 28.035,40.15 28.035,40.755 28.504,41.224 32.226,41.224 ; 25.495,45.6 26.765,45.6 28.035,45.6 ; 25.495,65.15 26.765,65.15 28.035,65.15 28.035,65.755 28.504,66.224 32.226,66.224 ; 25.495,70.6 26.765,70.6 28.035,70.6 ; 25.495,90.15 26.765,90.15 28.035,90.15 28.035,90.755 28.504,91.224 32.226,91.224 ; 25.495,95.6 26.765,95.6 28.035,95.6 ; 32.226,11.871 32.226,16.224 ; 32.226,36.871 32.226,41.224 ; 32.226,61.871 32.226,66.224 ; 32.226,86.871 32.226,91.224 ; 33.179,16.224 32.226,16.224 ; 33.179,41.224 32.226,41.224 ; 33.179,66.224 32.226,66.224 ; 33.179,91.224 32.226,91.224
  Bottom Layer w0.3: 8.35,4.54 10.89,7.08 v1(17.24,7.08) ; 8.35,29.54 10.89,32.08 v1(17.24,32.08) ; 8.35,54.54 10.89,57.08 v1(17.24,57.08) ; 8.35,79.54 10.89,82.08 v1(17.24,82.08) ; 10.89,4.54 12.16,5.81 22.32,5.81 ; 10.89,29.54 12.16,30.81 22.32,30.81 ; 10.89,54.54 12.16,55.81 22.32,55.81 ; 10.89,79.54 12.16,80.81 22.32,80.81 ; 11.144,19.018 12.152,19.018 12.16,19.01 ; 11.144,44.018 12.152,44.018 12.16,44.01 ; 11.144,69.018 12.152,69.018 12.16,69.01 ; 11.144,94.018 12.152,94.018 12.16,94.01 ; v1(12.16,16.732) 15.716,16.732 15.97,16.986 20.923,16.986 v1(22.447,18.51) ; v1(12.16,41.732) 15.716,41.732 15.97,41.986 20.923,41.986 v1(22.447,43.51) ; v1(12.16,66.732) 15.716,66.732 15.97,66.986 20.923,66.986 v1(22.447,68.51) ; v1(12.16,91.732) 15.716,91.732 15.97,91.986 20.923,91.986 v1(22.447,93.51) ; 13.43,4.54 15.335,2.635 29.305,2.635 31.21,4.54 ; 13.43,29.54 15.335,27.635 29.305,27.635 31.21,29.54 ; 13.43,54.54 15.335,52.635 29.305,52.635 31.21,54.54 ; 13.43,79.54 15.335,77.635 29.305,77.635 31.21,79.54 ; v1(22.066,7.08) 22.066,6.064 22.32,5.81 ; v1(22.066,32.08) 22.066,31.064 22.32,30.81 ; v1(22.066,57.08) 22.066,56.064 22.32,55.81 ; v1(22.066,82.08) 22.066,81.064 22.32,80.81 ; 28.67,4.54 27.4,5.81 22.32,5.81 ; 28.67,29.54 27.4,30.81 22.32,30.81 ; 28.67,54.54 27.4,55.81 22.32,55.81 ; 28.67,79.54 27.4,80.81 22.32,80.81 ; v1(46.318,11.398) 46.318,10.128 47.588,8.858 59.78,8.858 61.558,10.636 v1(61.558,12.414) ; v1(46.318,36.398) 46.318,35.128 47.588,33.858 59.78,33.858 61.558,35.636 v1(61.558,37.414) ; v1(46.318,61.398) 46.318,60.128 47.588,58.858 59.78,58.858 61.558,60.636 v1(61.558,62.414) ; v1(46.318,86.398) 46.318,85.128 47.588,83.858 59.78,83.858 61.558,85.636 v1(61.558,87.414) ; 48.35,12.16 50.89,9.62 59.272,9.62 60.542,10.89 60.542,12.922 61.05,13.43 61.573,13.43 65.383,9.62 66.13,9.62 ; 48.35,37.16 50.89,34.62 59.272,34.62 60.542,35.89 60.542,37.922 61.05,38.43 61.573,38.43 65.383,34.62 66.13,34.62 ; 48.35,62.16 50.89,59.62 59.272,59.62 60.542,60.89 60.542,62.922 61.05,63.43 61.573,63.43 65.383,59.62 66.13,59.62 ; 48.35,87.16 50.89,84.62 59.272,84.62 60.542,85.89 60.542,87.922 61.05,88.43 61.573,88.43 65.383,84.62 66.13,84.62 ; 50.89,4.54 52.16,5.81 67.4,5.81 68.67,4.54 ; 50.89,29.54 52.16,30.81 67.4,30.81 68.67,29.54 ; 50.89,54.54 52.16,55.81 67.4,55.81 68.67,54.54 ; 50.89,79.54 52.16,80.81 67.4,80.81 68.67,79.54 ; 52.16,12.16 52.229,12.091 52.229,11.329 53.176,10.382 58.51,10.382 59.526,11.398 59.526,13.43 60.288,14.192 62.066,14.192 65.368,10.89 67.4,10.89 68.67,9.62 ; 52.16,37.16 52.229,37.091 52.229,36.329 53.176,35.382 58.51,35.382 59.526,36.398 59.526,38.43 60.288,39.192 62.066,39.192 65.368,35.89 67.4,35.89 68.67,34.62 ; 52.16,62.16 52.229,62.091 52.229,61.329 53.176,60.382 58.51,60.382 59.526,61.398 59.526,63.43 60.288,64.192 62.066,64.192 65.368,60.89 67.4,60.89 68.67,59.62 ; 52.16,87.16 52.229,87.091 52.229,86.329 53.176,85.382 58.51,85.382 59.526,86.398 59.526,88.43 60.288,89.192 62.066,89.192 65.368,85.89 67.4,85.89 68.67,84.62 ; 53.43,4.54 54.7,3.27 69.94,3.27 71.21,4.54 ; 53.43,12.16 53.499,12.091 53.499,11.329 53.684,11.144 57.748,11.144 58.51,11.906 58.51,13.938 59.526,14.954 62.574,14.954 65.368,12.16 68.67,12.16 71.21,9.62 ; 53.43,29.54 54.7,28.27 69.94,28.27 71.21,29.54 ; 53.43,37.16 53.499,37.091 53.499,36.329 53.684,36.144 57.748,36.144 58.51,36.906 58.51,38.938 59.526,39.954 62.574,39.954 65.368,37.16 68.67,37.16 71.21,34.62 ; 53.43,54.54 54.7,53.27 69.94,53.27 71.21,54.54 ; 53.43,62.16 53.499,62.091 53.499,61.329 53.684,61.144 57.748,61.144 58.51,61.906 58.51,63.938 59.526,64.954 62.574,64.954 65.368,62.16 68.67,62.16 71.21,59.62 ; 53.43,79.54 54.7,78.27 69.94,78.27 71.21,79.54 ; 53.43,87.16 53.499,87.091 53.499,86.329 53.684,86.144 57.748,86.144 58.51,86.906 58.51,88.938 59.526,89.954 62.574,89.954 65.368,87.16 68.67,87.16 71.21,84.62 ; v1(61.304,15.97) v1(63.844,15.97) ; v1(61.304,40.97) v1(63.844,40.97) ; v1(61.304,65.97) v1(63.844,65.97) ; v1(61.304,90.97) v1(63.844,90.97) ; v1(66.13,13.43) 66.13,14.7 69.305,17.875 75.501,17.875 v1(77.56,15.816) ; v1(66.13,38.43) 66.13,39.7 69.305,42.875 75.501,42.875 v1(77.56,40.816) ; v1(66.13,63.43) 66.13,64.7 69.305,67.875 75.501,67.875 v1(77.56,65.816) ; v1(66.13,88.43) 66.13,89.7 69.305,92.875 75.501,92.875 v1(77.56,90.816) ; v1@71.47,16.218 73.048,14.64 v1@73.048,12.16 ; v1@71.47,41.218 73.048,39.64 v1@73.048,37.16 ; v1@71.47,66.218 73.048,64.64 v1@73.048,62.16 ; v1@71.47,91.218 73.048,89.64 v1@73.048,87.16
  Bottom Layer w0.4: v1(6.826,10.382) 8.096,9.112 v1(16.986,9.112) ; v1(6.826,35.382) 8.096,34.112 v1(16.986,34.112) ; v1(6.826,60.382) 8.096,59.112 v1(16.986,59.112) ; v1(6.826,85.382) 8.096,84.112 v1(16.986,84.112) ; v1(7.588,23.59) 7.588,21.304 6.572,20.288 6.572,11.906 6.064,11.398 6.064,9.366 7.334,8.096 19.312,8.096 20.796,9.58 20.796,10.636 ; v1(7.588,48.59) 7.588,46.304 6.572,45.288 6.572,36.906 6.064,36.398 6.064,34.366 7.334,33.096 19.312,33.096 20.796,34.58 20.796,35.636 ; v1(7.588,73.59) 7.588,71.304 6.572,70.288 6.572,61.906 6.064,61.398 6.064,59.366 7.334,58.096 19.312,58.096 20.796,59.58 20.796,60.636 ; v1(7.588,98.59) 7.588,96.304 6.572,95.288 6.572,86.906 6.064,86.398 6.064,84.366 7.334,83.096 19.312,83.096 20.796,84.58 20.796,85.636 ; v1(8.35,16.732) 8.35,15.208 7.334,14.192 7.334,11.398 8.096,10.636 10.181,10.636 10.89,11.345 10.89,12.16 ; v1(8.35,41.732) 8.35,40.208 7.334,39.192 7.334,36.398 8.096,35.636 10.181,35.636 10.89,36.345 10.89,37.16 ; v1(8.35,66.732) 8.35,65.208 7.334,64.192 7.334,61.398 8.096,60.636 10.181,60.636 10.89,61.345 10.89,62.16 ; v1(8.35,91.732) 8.35,90.208 7.334,89.192 7.334,86.398 8.096,85.636 10.181,85.636 10.89,86.345 10.89,87.16 ; v1(9.493,18.129) 9.62,18.002 9.62,12.16 ; v1(9.493,43.129) 9.62,43.002 9.62,37.16 ; v1(9.493,68.129) 9.62,68.002 9.62,62.16 ; v1(9.493,93.129) 9.62,93.002 9.62,87.16 ; v1(10.255,18.891) 10.382,18.764 10.382,14.446 11.652,13.176 16.224,13.176 v1(18.764,10.636) ; v1(10.255,43.891) 10.382,43.764 10.382,39.446 11.652,38.176 16.224,38.176 v1(18.764,35.636) ; v1(10.255,68.891) 10.382,68.764 10.382,64.446 11.652,63.176 16.224,63.176 v1(18.764,60.636) ; v1(10.255,93.891) 10.382,93.764 10.382,89.446 11.652,88.176 16.224,88.176 v1(18.764,85.636) ; 12.16,18.01 12.21,18.01 12.726,17.494 14.446,17.494 14.7,17.748 v1(14.7,21.812) ; 12.16,43.01 12.21,43.01 12.726,42.494 14.446,42.494 14.7,42.748 v1(14.7,46.812) ; 12.16,68.01 12.21,68.01 12.726,67.494 14.446,67.494 14.7,67.748 v1(14.7,71.812) ; 12.16,93.01 12.21,93.01 12.726,92.494 14.446,92.494 14.7,92.748 v1(14.7,96.812) ; 13.43,12.16 13.43,10.89 14.192,10.128 17.662,10.128 18.17,9.62 19.677,9.62 19.911,9.854 19.911,10.591 16.485,14.017 16.018,14.017 v1(15.97,14.065) ; v1(13.43,18.51) v1(13.43,21.812) 13.498,21.812 14.514,22.828 20.103,22.828 ; 13.43,37.16 13.43,35.89 14.192,35.128 17.662,35.128 18.17,34.62 19.677,34.62 19.911,34.854 19.911,35.591 16.485,39.017 16.018,39.017 v1(15.97,39.065) ; v1(13.43,43.51) v1(13.43,46.812) 13.498,46.812 14.514,47.828 20.103,47.828 ; 13.43,62.16 13.43,60.89 14.192,60.128 17.662,60.128 18.17,59.62 19.677,59.62 19.911,59.854 19.911,60.591 16.485,64.017 16.018,64.017 v1(15.97,64.065) ; v1(13.43,68.51) v1(13.43,71.812) 13.498,71.812 14.514,72.828 20.103,72.828 ; 13.43,87.16 13.43,85.89 14.192,85.128 17.662,85.128 18.17,84.62 19.677,84.62 19.911,84.854 19.911,85.591 16.485,89.017 16.018,89.017 v1(15.97,89.065) ; v1(13.43,93.51) v1(13.43,96.812) 13.498,96.812 14.514,97.828 20.103,97.828 ; v1(16.986,18.527) 17.034,18.575 17.432,18.575 22.339,23.482 24.46,23.482 27.4,20.542 27.4,13.312 28.315,12.397 31.102,12.397 32.204,13.499 32.204,14.869 31.992,15.081 31.025,15.081 30.546,15.081 30.419,15.208 29.17,15.208 ; v1(16.986,43.527) 17.034,43.575 17.432,43.575 22.339,48.482 24.46,48.482 27.4,45.542 27.4,38.312 28.315,37.397 31.102,37.397 32.204,38.499 32.204,39.869 31.992,40.081 31.025,40.081 30.546,40.081 30.419,40.208 29.17,40.208 ; v1(16.986,68.527) 17.034,68.575 17.432,68.575 22.339,73.482 24.46,73.482 27.4,70.542 27.4,63.312 28.315,62.397 31.102,62.397 32.204,63.499 32.204,64.869 31.992,65.081 31.025,65.081 30.546,65.081 30.419,65.208 29.17,65.208 ; v1(16.986,93.527) 17.034,93.575 17.432,93.575 22.339,98.482 24.46,98.482 27.4,95.542 27.4,88.312 28.315,87.397 31.102,87.397 32.204,88.499 32.204,89.869 31.992,90.081 31.025,90.081 30.546,90.081 30.419,90.208 29.17,90.208 ; v1(17.24,21.812) 17.24,21.05 15.716,19.526 15.716,18.256 15.97,18.002 15.97,17.982 16.204,17.748 20.034,17.748 21.575,19.289 23.028,19.289 24.369,17.948 24.369,16.409 23.549,15.589 18.129,15.589 17.367,14.827 17.367,14.065 20.796,10.636 ; v1(17.24,46.812) 17.24,46.05 15.716,44.526 15.716,43.256 15.97,43.002 15.97,42.982 16.204,42.748 20.034,42.748 21.575,44.289 23.028,44.289 24.369,42.948 24.369,41.409 23.549,40.589 18.129,40.589 17.367,39.827 17.367,39.065 20.796,35.636 ; v1(17.24,71.812) 17.24,71.05 15.716,69.526 15.716,68.256 15.97,68.002 15.97,67.982 16.204,67.748 20.034,67.748 21.575,69.289 23.028,69.289 24.369,67.948 24.369,66.409 23.549,65.589 18.129,65.589 17.367,64.827 17.367,64.065 20.796,60.636 ; v1(17.24,96.812) 17.24,96.05 15.716,94.526 15.716,93.256 15.97,93.002 15.97,92.982 16.204,92.748 20.034,92.748 21.575,94.289 23.028,94.289 24.369,92.948 24.369,91.409 23.549,90.589 18.129,90.589 17.367,89.827 17.367,89.065 20.796,85.636 ; v1(17.445,23.836) 14.311,23.836 v1(12.16,21.685) 11.144,20.669 11.144,19.018 11.144,14.954 12.033,14.065 v1(15.97,14.065) ; v1(17.445,48.836) 14.311,48.836 v1(12.16,46.685) 11.144,45.669 11.144,44.018 11.144,39.954 12.033,39.065 v1(15.97,39.065) ; v1(17.445,73.836) 14.311,73.836 v1(12.16,71.685) 11.144,70.669 11.144,69.018 11.144,64.954 12.033,64.065 v1(15.97,64.065) ; v1(17.445,98.836) 14.311,98.836 v1(12.16,96.685) 11.144,95.669 11.144,94.018 11.144,89.954 12.033,89.065 v1(15.97,89.065) ; v1(19.145,21.832) 19.145,21.87 20.103,22.828 ; v1(19.145,46.832) 19.145,46.87 20.103,47.828 ; v1(19.145,71.832) 19.145,71.87 20.103,72.828 ; v1(19.145,96.832) 19.145,96.87 20.103,97.828 ; v1(19.399,14.192) 20.542,14.192 26.892,7.842 29.178,7.842 30.956,6.064 35.274,6.064 36.29,7.08 36.29,9.62 35.02,10.89 v1(34.004,10.89) ; v1(19.399,39.192) 20.542,39.192 26.892,32.842 29.178,32.842 30.956,31.064 35.274,31.064 36.29,32.08 36.29,34.62 35.02,35.89 v1(34.004,35.89) ; v1(19.399,64.192) 20.542,64.192 26.892,57.842 29.178,57.842 30.956,56.064 35.274,56.064 36.29,57.08 36.29,59.62 35.02,60.89 v1(34.004,60.89) ; v1(19.399,89.192) 20.542,89.192 26.892,82.842 29.178,82.842 30.956,81.064 35.274,81.064 36.29,82.08 36.29,84.62 35.02,85.89 v1(34.004,85.89) ; v1(20.034,19.018) 21.05,20.034 23.59,20.034 25.114,18.51 25.114,15.843 24.242,14.971 18.617,14.971 18.383,14.737 18.383,14.106 20.964,11.525 22.193,11.525 23.082,10.636 v1(23.082,9.366) ; v1(20.034,44.018) 21.05,45.034 23.59,45.034 25.114,43.51 25.114,40.843 24.242,39.971 18.617,39.971 18.383,39.737 18.383,39.106 20.964,36.525 22.193,36.525 23.082,35.636 v1(23.082,34.366) ; v1(20.034,69.018) 21.05,70.034 23.59,70.034 25.114,68.51 25.114,65.843 24.242,64.971 18.617,64.971 18.383,64.737 18.383,64.106 20.964,61.525 22.193,61.525 23.082,60.636 v1(23.082,59.366) ; v1(20.034,94.018) 21.05,95.034 23.59,95.034 25.114,93.51 25.114,90.843 24.242,89.971 18.617,89.971 18.383,89.737 18.383,89.106 20.964,86.525 22.193,86.525 23.082,85.636 v1(23.082,84.366) ; v1(21.661,14.175) 21.661,14.089 26.892,8.858 30.956,8.858 32.734,7.08 34.786,7.08 35.274,7.568 35.274,9.112 34.814,9.572 34.052,9.572 v1(34.004,9.62) ; v1(21.661,39.175) 21.661,39.089 26.892,33.858 30.956,33.858 32.734,32.08 34.786,32.08 35.274,32.568 35.274,34.112 34.814,34.572 34.052,34.572 v1(34.004,34.62) ; v1(21.661,64.175) 21.661,64.089 26.892,58.858 30.956,58.858 32.734,57.08 34.786,57.08 35.274,57.568 35.274,59.112 34.814,59.572 34.052,59.572 v1(34.004,59.62) ; v1(21.661,89.175) 21.661,89.089 26.892,83.858 30.956,83.858 32.734,82.08 34.786,82.08 35.274,82.568 35.274,84.112 34.814,84.572 34.052,84.572 v1(34.004,84.62) ; v1(21.812,10.636) 20.796,10.636 ; v1(21.812,35.636) 20.796,35.636 ; v1(21.812,60.636) 20.796,60.636 ; v1(21.812,85.636) 20.796,85.636 ; v1(21.939,21.558) 22.93,22.549 23.775,22.549 26.638,19.686 v1(26.638,11.652) ; v1(21.939,46.558) 22.93,47.549 23.775,47.549 26.638,44.686 v1(26.638,36.652) ; v1(21.939,71.558) 22.93,72.549 23.775,72.549 26.638,69.686 v1(26.638,61.652) ; v1(21.939,96.558) 22.93,97.549 23.775,97.549 26.638,94.686 v1(26.638,86.652) ; v1(22.066,8.35) 23.082,8.35 24.606,6.826 28.924,6.826 31.21,4.54 ; v1(22.066,33.35) 23.082,33.35 24.606,31.826 28.924,31.826 31.21,29.54 ; v1(22.066,58.35) 23.082,58.35 24.606,56.826 28.924,56.826 31.21,54.54 ; v1(22.066,83.35) 23.082,83.35 24.606,81.826 28.924,81.826 31.21,79.54 ; v1(22.955,16.859) 22.447,16.351 17.494,16.351 15.97,14.827 v1(15.97,14.065) ; v1(22.955,41.859) 22.447,41.351 17.494,41.351 15.97,39.827 v1(15.97,39.065) ; v1(22.955,66.859) 22.447,66.351 17.494,66.351 15.97,64.827 v1(15.97,64.065) ; v1(22.955,91.859) 22.447,91.351 17.494,91.351 15.97,89.827 v1(15.97,89.065) ; v1(23.463,21.795) 23.463,21.431 25.876,19.018 25.876,13.303 25.368,12.795 25.368,11.398 26.892,9.874 31.21,9.874 32.734,8.35 v1(34.004,8.35) ; v1(23.463,46.795) 23.463,46.431 25.876,44.018 25.876,38.303 25.368,37.795 25.368,36.398 26.892,34.874 31.21,34.874 32.734,33.35 v1(34.004,33.35) ; v1(23.463,71.795) 23.463,71.431 25.876,69.018 25.876,63.303 25.368,62.795 25.368,61.398 26.892,59.874 31.21,59.874 32.734,58.35 v1(34.004,58.35) ; v1(23.463,96.795) 23.463,96.431 25.876,94.018 25.876,88.303 25.368,87.795 25.368,86.398 26.892,84.874 31.21,84.874 32.734,83.35 v1(34.004,83.35) ; v1(27.4,10.89) 27.654,11.144 32.226,11.144 32.988,11.906 32.988,16.986 32.353,17.621 31.025,17.621 30.987,17.659 29.851,17.659 28.17,15.978 ; v1(27.4,35.89) 27.654,36.144 32.226,36.144 32.988,36.906 32.988,41.986 32.353,42.621 31.025,42.621 30.987,42.659 29.851,42.659 28.17,40.978 ; v1(27.4,60.89) 27.654,61.144 32.226,61.144 32.988,61.906 32.988,66.986 32.353,67.621 31.025,67.621 30.987,67.659 29.851,67.659 28.17,65.978 ; v1(27.4,85.89) 27.654,86.144 32.226,86.144 32.988,86.906 32.988,91.986 32.353,92.621 31.025,92.621 30.987,92.659 29.851,92.659 28.17,90.978 ; 28.17,13.684 28.17,15.208 28.17,15.978 ; 28.17,38.684 28.17,40.208 28.17,40.978 ; 28.17,63.684 28.17,65.208 28.17,65.978 ; 28.17,88.684 28.17,90.208 28.17,90.978 ; 29.195,13.728 29.17,13.703 29.17,13.684 29.94,13.684 ; 29.195,38.728 29.17,38.703 29.17,38.684 29.94,38.684 ; 29.195,63.728 29.17,63.703 29.17,63.684 29.94,63.684 ; 29.195,88.728 29.17,88.703 29.17,88.684 29.94,88.684 ; v1(29.94,13.176) 29.94,13.684 ; v1(29.94,38.176) 29.94,38.684 ; v1(29.94,63.176) 29.94,63.684 ; v1(29.94,88.176) 29.94,88.684 ; 31.025,13.811 30.546,13.811 30.419,13.684 29.94,13.684 ; 31.025,38.811 30.546,38.811 30.419,38.684 29.94,38.684 ; 31.025,63.811 30.546,63.811 30.419,63.684 29.94,63.684 ; 31.025,88.811 30.546,88.811 30.419,88.684 29.94,88.684 ; v1(34.004,12.16) 34.004,13.43 34.385,13.811 36.475,13.811 ; v1(34.004,37.16) 34.004,38.43 34.385,38.811 36.475,38.811 ; v1(34.004,62.16) 34.004,63.43 34.385,63.811 36.475,63.811 ; v1(34.004,87.16) 34.004,88.43 34.385,88.811 36.475,88.811 ; 36.398,16.351 36.437,16.389 36.475,16.351 38.167,16.351 38.528,15.99 38.528,15.256 v1(38.576,15.208) ; 36.398,41.351 36.437,41.389 36.475,41.351 38.167,41.351 38.528,40.99 38.528,40.256 v1(38.576,40.208) ; 36.398,66.351 36.437,66.389 36.475,66.351 38.167,66.351 38.528,65.99 38.528,65.256 v1(38.576,65.208) ; 36.398,91.351 36.437,91.389 36.475,91.351 38.167,91.351 38.528,90.99 38.528,90.256 v1(38.576,90.208) ; 36.513,17.583 36.475,17.621 38.381,17.621 38.508,17.494 v1(38.576,17.494) ; 36.513,42.583 36.475,42.621 38.381,42.621 38.508,42.494 v1(38.576,42.494) ; 36.513,67.583 36.475,67.621 38.381,67.621 38.508,67.494 v1(38.576,67.494) ; 36.513,92.583 36.475,92.621 38.381,92.621 38.508,92.494 v1(38.576,92.494) ; v1(46.318,11.398) 46.318,18.002 47.588,19.272 51.652,19.272 52.414,18.51 v1(53.938,18.51) 55.462,20.034 v1(55.462,20.542) 55.462,23.59 55.97,24.098 62.32,24.098 65.114,21.304 65.114,17.474 64.88,17.24 62.066,17.24 61.05,18.256 v1(61.05,21.812) ; v1(46.318,36.398) 46.318,43.002 47.588,44.272 51.652,44.272 52.414,43.51 v1(53.938,43.51) 55.462,45.034 v1(55.462,45.542) 55.462,48.59 55.97,49.098 62.32,49.098 65.114,46.304 65.114,42.474 64.88,42.24 62.066,42.24 61.05,43.256 v1(61.05,46.812) ; v1(46.318,61.398) 46.318,68.002 47.588,69.272 51.652,69.272 52.414,68.51 v1(53.938,68.51) 55.462,70.034 v1(55.462,70.542) 55.462,73.59 55.97,74.098 62.32,74.098 65.114,71.304 65.114,67.474 64.88,67.24 62.066,67.24 61.05,68.256 v1(61.05,71.812) ; v1(46.318,86.398) 46.318,93.002 47.588,94.272 51.652,94.272 52.414,93.51 v1(53.938,93.51) 55.462,95.034 v1(55.462,95.542) 55.462,98.59 55.97,99.098 62.32,99.098 65.114,96.304 65.114,92.474 64.88,92.24 62.066,92.24 61.05,93.256 v1(61.05,96.812) ; v1(48.35,10.128) 47.334,11.144 47.334,12.668 48.33,13.664 48.604,13.938 v1(48.604,18.002) ; v1(48.35,35.128) 47.334,36.144 47.334,37.668 48.33,38.664 48.604,38.938 v1(48.604,43.002) ; v1(48.35,60.128) 47.334,61.144 47.334,62.668 48.33,63.664 48.604,63.938 v1(48.604,68.002) ; v1(48.35,85.128) 47.334,86.144 47.334,87.668 48.33,88.664 48.604,88.938 v1(48.604,93.002) ; v1(49.62,14.609) 49.668,14.657 49.845,14.657 49.888,14.7 52.16,14.7 53.43,13.43 ; v1(49.62,39.609) 49.668,39.657 49.845,39.657 49.888,39.7 52.16,39.7 53.43,38.43 ; v1(49.62,64.609) 49.668,64.657 49.845,64.657 49.888,64.7 52.16,64.7 53.43,63.43 ; v1(49.62,89.609) 49.668,89.657 49.845,89.657 49.888,89.7 52.16,89.7 53.43,88.43 ; 53.43,12.16 53.43,13.43 ; 53.43,37.16 53.43,38.43 ; 53.43,62.16 53.43,63.43 ; 53.43,87.16 53.43,88.43 ; v1(55.208,18.51) 54.192,17.494 v1(54.192,14.446) 53.43,13.684 53.43,13.43 ; v1(55.208,43.51) 54.192,42.494 v1(54.192,39.446) 53.43,38.684 53.43,38.43 ; v1(55.208,68.51) 54.192,67.494 v1(54.192,64.446) 53.43,63.684 53.43,63.43 ; v1(55.208,93.51) 54.192,92.494 v1(54.192,89.446) 53.43,88.684 53.43,88.43 ; 57.24,13.938 57.156,14.022 56.14,14.022 55.716,14.446 55.716,17.748 56.732,18.764 56.732,22.594 56.966,22.828 61.812,22.828 63.59,21.05 v1(63.59,18.51) ; 57.24,38.938 57.156,39.022 56.14,39.022 55.716,39.446 55.716,42.748 56.732,43.764 56.732,47.594 56.966,47.828 61.812,47.828 63.59,46.05 v1(63.59,43.51) ; 57.24,63.938 57.156,64.022 56.14,64.022 55.716,64.446 55.716,67.748 56.732,68.764 56.732,72.594 56.966,72.828 61.812,72.828 63.59,71.05 v1(63.59,68.51) ; 57.24,88.938 57.156,89.022 56.14,89.022 55.716,89.446 55.716,92.748 56.732,93.764 56.732,97.594 56.966,97.828 61.812,97.828 63.59,96.05 v1(63.59,93.51) ; v1(57.748,21.558) 57.768,21.558 58.256,21.07 58.256,16.224 59.526,14.954 ; v1(57.748,46.558) 57.768,46.558 58.256,46.07 58.256,41.224 59.526,39.954 ; v1(57.748,71.558) 57.768,71.558 58.256,71.07 58.256,66.224 59.526,64.954 ; v1(57.748,96.558) 57.768,96.558 58.256,96.07 58.256,91.224 59.526,89.954 ; 20.103,22.828 21.436,24.161 24.797,24.161 28.17,20.788 28.17,15.978 ; 20.103,47.828 21.436,49.161 24.797,49.161 28.17,45.788 28.17,40.978 ; 20.103,72.828 21.436,74.161 24.797,74.161 28.17,70.788 28.17,65.978 ; 20.103,97.828 21.436,99.161 24.797,99.161 28.17,95.788 28.17,90.978
  other v2: 3.27,22.955 38.73,22.955 43.27,22.955 78.73,22.955 3.27,47.955 38.73,47.955 43.27,47.955 78.73,47.955 3.27,72.955 38.73,72.955 43.27,72.955 78.73,72.955 3.27,97.955 38.73,97.955 43.27,97.955 78.73,97.955

## Silkscreen, mask and mechanical layers (free items; w line width, h text height)
Top Overlay:
  lines w0.2: 0,0 0,102 82,102 82,0 0,0 ; 31.298,21.631 31.819,23.064 35.877,21.587 35.355,20.155 31.298,21.631 ; 31.298,46.631 31.819,48.064 35.877,46.587 35.355,45.155 31.298,46.631 ; 31.298,71.631 31.819,73.064 35.877,71.587 35.355,70.155 31.298,71.631 ; 31.298,96.631 31.819,98.064 35.877,96.587 35.355,95.155 31.298,96.631